# Altium PCB DClassAmp.PcbDoc (part 2 of 3)
Units mm, origin at the board's own origin, x right, y up, seen from the top; angles counter-clockwise.
Board outline 100 x 100 mm, 4 copper layers (Top Layer, Layer 1, Layer 2, Bottom Layer), stack 1.57 mm thick; 192 components, 70 nets, 450 pads, 316 vias.
Unrouted connection lines stored in the file: 103.
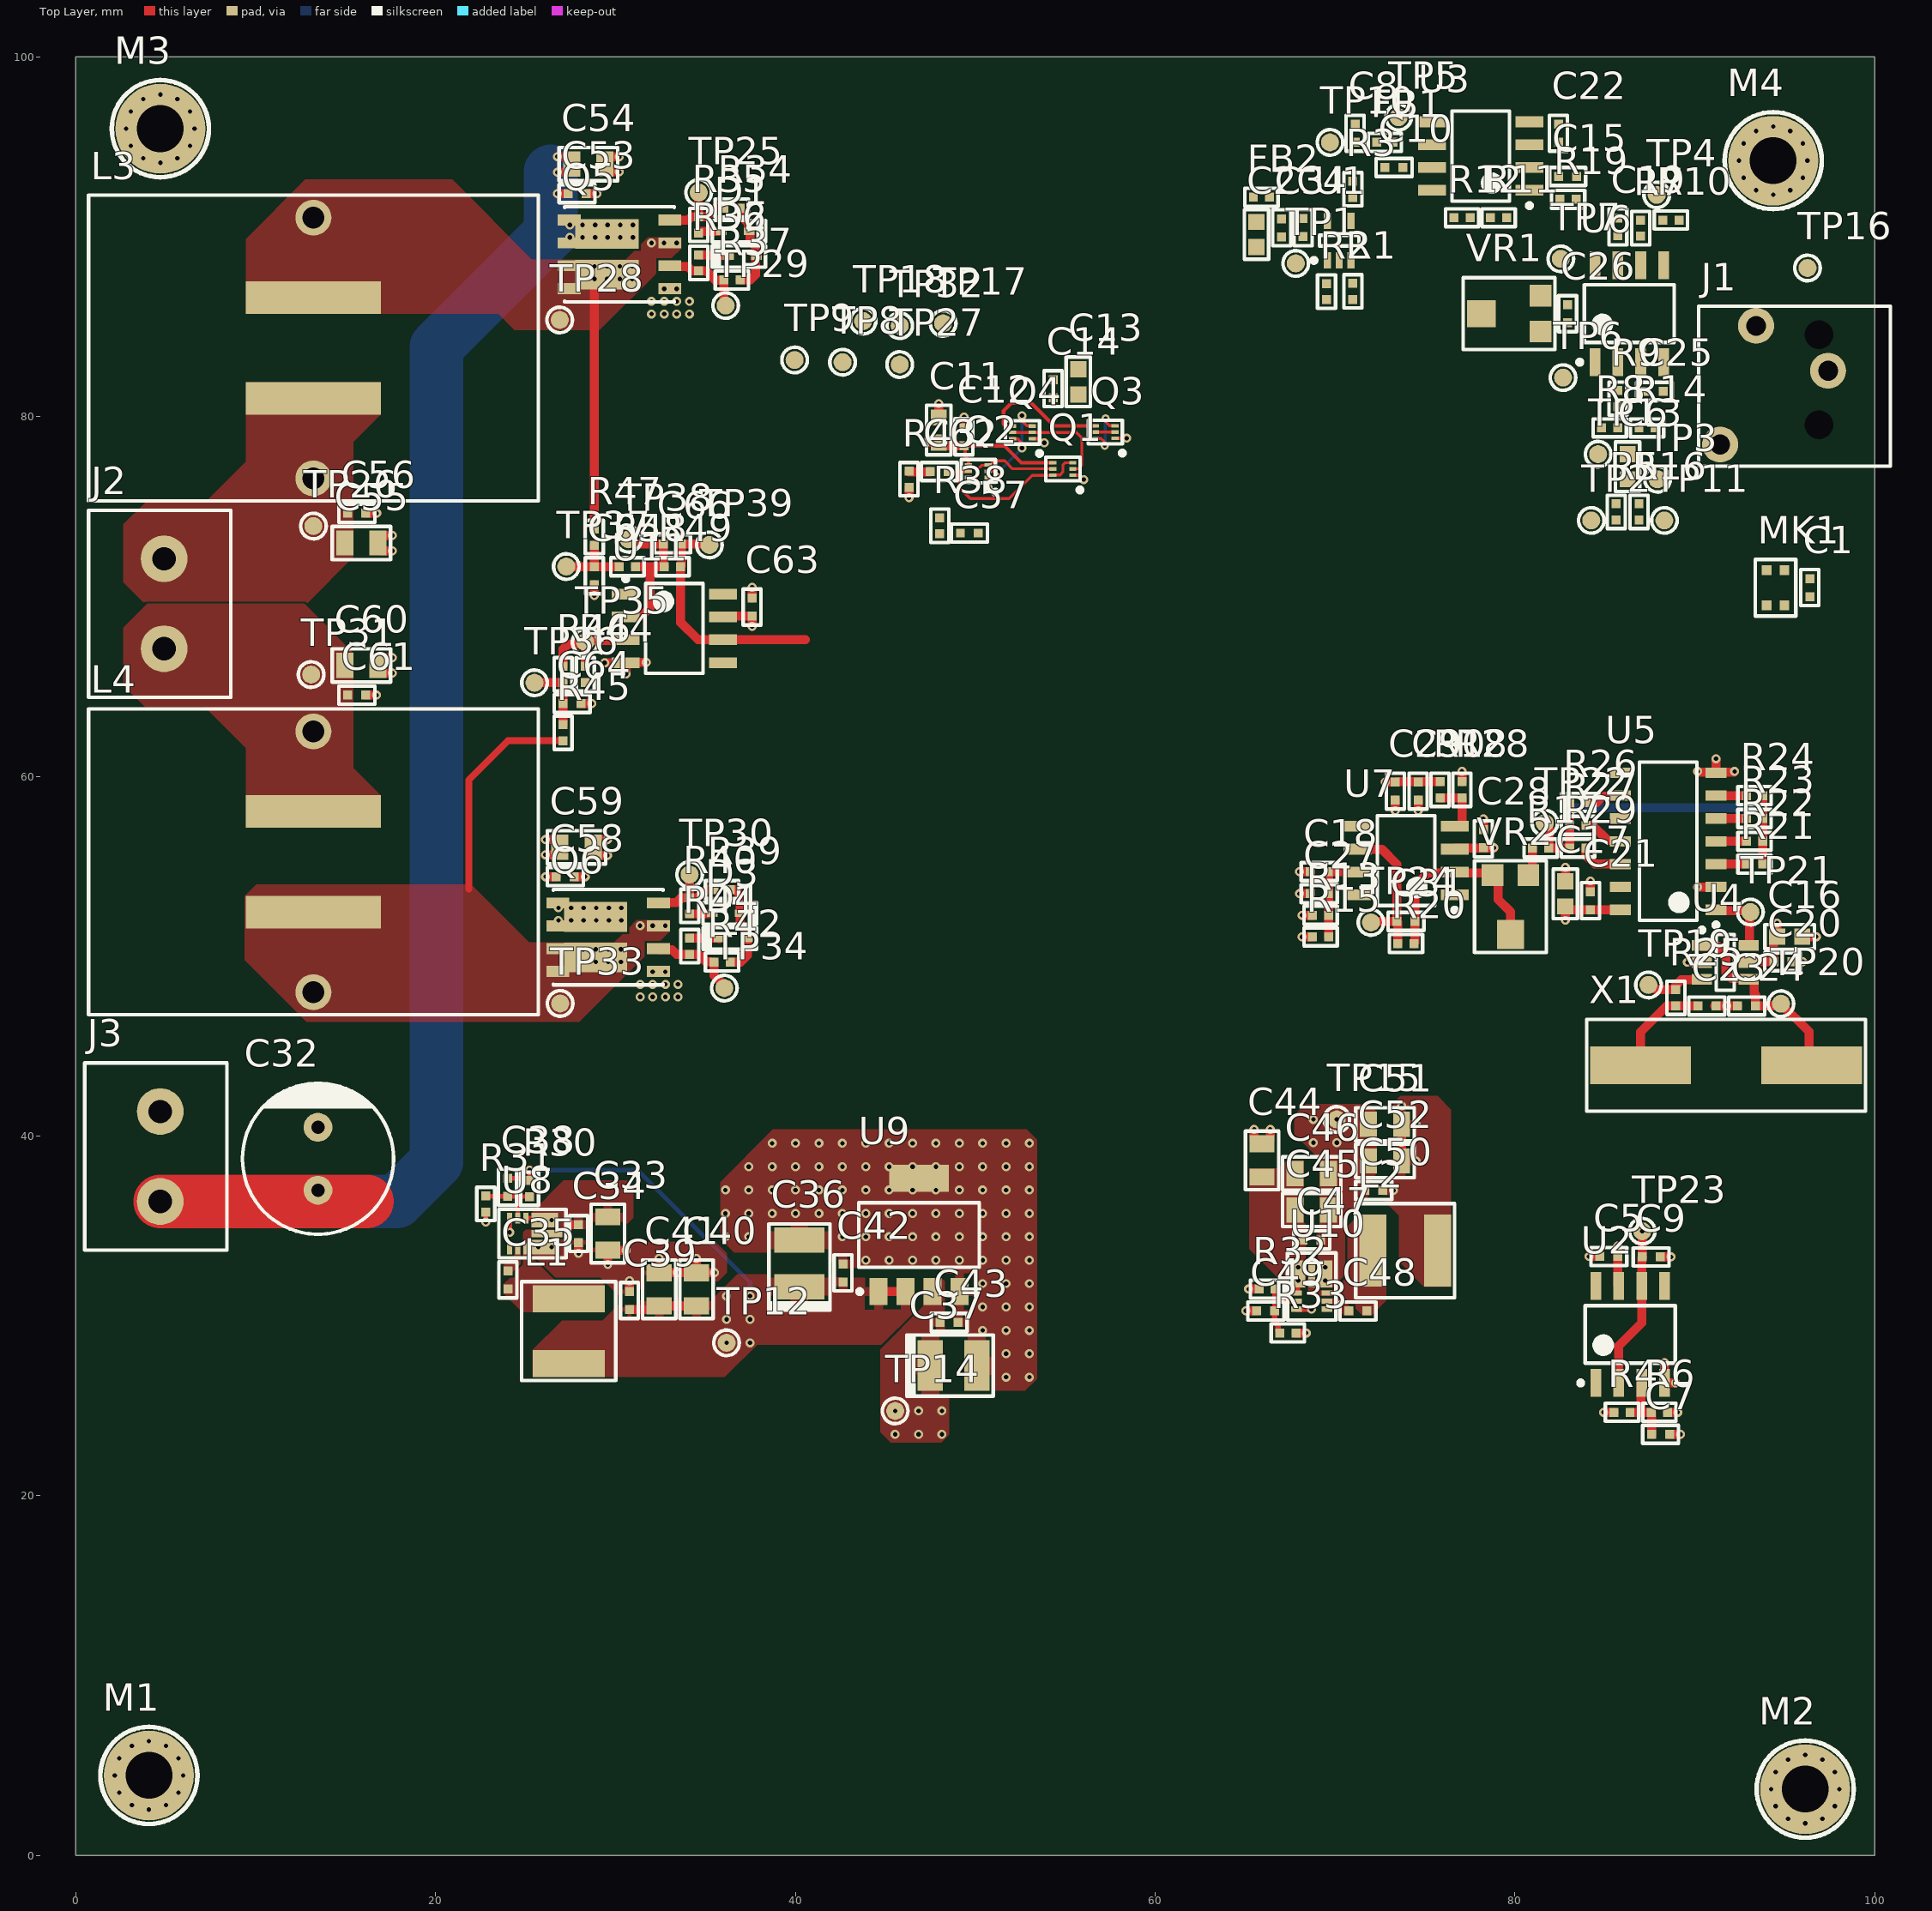
[diagram p0: Top Layer view]

## Part data (continued)
R1 R2 R3 R5 R12 R13 R15 R16 R18 R21 R22 R23 R24 R25 R26 R27 R28 R29: library part "RES 0R 63mW 0402", "GLOVE, POLYAMIDE, L/FREE, PU, SIZE 6 - More Details", Case Code (Imperial)=0402, Case Code (Metric)=1005, Current Rating=1A, Manufacturer="Stackpole Electronics", Manufacturer Part Number=RMCF0402ZT0R00, Max Operating Temperature=155°C, Max Power Dissipation=63mW, Min Operating Temperature=-55°C, Resistor Type="Thick Film", Supplier Part Number 1=RMCF0402ZT0R00CT-ND, Working Voltage=50V, Case/Package=0402, Category="Chip SMD Resistors", ComponentLink1Description=https://datasheet.ciiva.com/26835/getdatasheetpartid-409751-26835612.pdf?src-supplier=Verical, ComponentLink1URL=https://datasheet.ciiva.com/26835/getdatasheetpartid-409751-26835612.pdf?src-supplier=Verical, Construction=Rectangular, Contact Plating=Tin,Matte, Depth=0.5mm, Features="Automotive AEC-Q200", Height=0.016inch, Lead Free="Lead Free", Length=0.039inch, Military Standard=Not, Mount="Surface Mount", Number of Terminations=2, Packaging="Tape and Reel", Power Rating=63mW, Pricing 1="1=0.10000, 10=0.01000, 25=0.00720, 50=0.00560, 100=0.00410, 250=0.00316, 500=0.00252, 1000=0.00186, 5000=0.00133 (USD)", Radiation Hardening=No, Resistance=0R, RoHS=Yes, RoHS Compliant=Yes, Series=RMCF, Stock 1=5203223, Supplier 1=Digi-Key, Technology="THICK FILM", Width=0.02inch
R4 R6: library part "RES 10k00 0.1% 63mW 0402", "Res Thin Film 0402 10K Ohm 0.1% 0.063W ±25ppm/°C Molded SMD Punched Carrier T/R", Case Code (Imperial)=0402, Case Code (Metric)=1005, Manufacturer=Panasonic, Manufacturer Part Number=ERA-2AEB103X, Max Operating Temperature=155°C, Max Power Dissipation=63mW, Min Operating Temperature=-55°C, Package Quantity=1, Resistance=10kR, Resistance Tolerance=0.1%, Resistor Type="Thin Film", Supplier Part Number 1=P10KDCCT-ND, Temperature Coefficient=25ppm/°C, Voltage Rating=25V, Case/Package=0402, Category="Chip SMD Resistors", ComponentLink1Description=https://datasheet.ciiva.com/11812/0900766b80beefcc-11812131.pdf?src-supplier=RSComponents, ComponentLink1URL=https://datasheet.ciiva.com/11812/0900766b80beefcc-11812131.pdf?src-supplier=RSComponents, ComponentLink2Description=https://datasheet.ciiva.com/7001/39845-7001394.pdf?src-supplier=Newark, ComponentLink2URL=https://datasheet.ciiva.com/7001/39845-7001394.pdf?src-supplier=Newark, ComponentLink3Description=https://datasheet.ciiva.com/5838/328837-5838011.pdf?src-supplier=Farnell, ComponentLink3URL=https://datasheet.ciiva.com/5838/328837-5838011.pdf?src-supplier=Farnell, ComponentLink4Description=https://datasheet.ciiva.com/9116/aoa0000ce26-9116649.pdf?src-supplier=Avnet, ComponentLink4URL=https://datasheet.ciiva.com/9116/aoa0000ce26-9116649.pdf?src-supplier=Avnet, ComponentLink5Description=https://datasheet.ciiva.com/9117/aoa0000ce26-9117366.pdf?src-supplier=Avnet, ComponentLink5URL=https://datasheet.ciiva.com/9117/aoa0000ce26-9117366.pdf?src-supplier=Avnet, ComponentLink6Description=https://datasheet.ciiva.com/30213/54aoa0000ce26-30213096.pdf?src-supplier=Onlinecomponents.com, ComponentLink6URL=https://datasheet.ciiva.com/30213/54aoa0000ce26-30213096.pdf?src-supplier=Onlinecomponents.com, ComponentLink7Description=https://datasheet.ciiva.com/16426/aoa0000ce26-16426203.pdf?src-supplier=Future+Electronics, ComponentLink7URL=https://datasheet.ciiva.com/16426/aoa0000ce26-16426203.pdf?src-supplier=Future+Electronics, ComponentLink8Description=https://datasheet.ciiva.com/46398/328837-46398998.pdf?src-supplier=Element14, ComponentLink8URL=https://datasheet.ciiva.com/46398/328837-46398998.pdf?src-supplier=Element14, ComponentLink9Description=https://datasheet.ciiva.com/46398/328837-46398999.pdf?src-supplier=Element14, ComponentLink9URL=https://datasheet.ciiva.com/46398/328837-46398999.pdf?src-supplier=Element14, ComponentLink10Description=https://datasheet.ciiva.com/16768/70068849-16768699.pdf?src-supplier=Allied+Electronics, ComponentLink10URL=https://datasheet.ciiva.com/16768/70068849-16768699.pdf?src-supplier=Allied+Electronics, Construction=Rectangular, Contact Plating=Tin, Depth=0.5mm, Features="Automotive AEC-Q200", Height=0.35mm, Lead Free="Lead Free", Length=1mm, Military Standard=Not, Mount="Surface Mount", Number of Pins=2, Number of Terminations=2, Packaging="Tape and Reel", Power Rating=63mW, Pricing 1="1=0.44000, 10=0.31900, 100=0.12780, 1000=0.06295, 2500=0.05832, 5000=0.05277 (USD)", Radiation Hardening=No, REACH SVHC=Unknown, RoHS=Yes, RoHS Compliant=Yes, Series=ERA-2A, Size Code=0402, Stock 1=522097, Supplier 1=Digi-Key, Technology="METAL FILM", Termination=SMD/SMT, Tolerance=0.1%, Voltage Rating (DC)=25V, Width=0.5mm
R7 R10: library part "RES 15k0 1% 63mW 0402", "Res Thick Film 0402 15K Ohm 1% 0.063W(1/16W) ±100ppm/C Pad SMD Automotive T/R", Case Code (Imperial)=0402, Case Code (Metric)=1005, Manufacturer="Stackpole Electronics", Manufacturer Part Number=RMCF0402FT15K0, Max Operating Temperature=155°C, Max Power Dissipation=63mW, Min Operating Temperature=-55°C, Resistance=15kR, Resistor Type="Thick Film", Supplier Part Number 1=RMCF0402FT15K0CT-ND, Temperature Coefficient=100ppm/°C, Tolerance=1%, Case/Package=0402, Category="Chip SMD Resistors", ComponentLink1Description=http://components.arrow.com/part/dataview/50576585S147344N1174?src-supplier=Arrow+Electronics, ComponentLink1URL=http://components.arrow.com/part/dataview/50576585S147344N1174?src-supplier=Arrow+Electronics, ComponentLink2Description=http://www1.futureelectronics.com/doc/STACKPOLE%20ELECTRONICS/RMCF-1__16S-15K-1%25-R.pdf?src-supplier=Future+Electronics, ComponentLink2URL=http://www1.futureelectronics.com/doc/STACKPOLE%20ELECTRONICS/RMCF-1__16S-15K-1%25-R.pdf?src-supplier=Future+Electronics, ComponentLink3Description=https://www.seielect.com/catalog/SEI-RMCF_RMCP.pdf?src-supplier=Avnet, ComponentLink3URL=https://www.seielect.com/catalog/SEI-RMCF_RMCP.pdf?src-supplier=Avnet, ComponentLink4Description=https://www.seielect.com/catalog/sei-rmcf_rmcp.pdf?src-supplier=Digi-Key, ComponentLink4URL=https://www.seielect.com/catalog/sei-rmcf_rmcp.pdf?src-supplier=Digi-Key, Contact Plating=Tin,Matte, Features="Automotive AEC-Q200", Height=0.016inch, Lead Free="Lead Free", Length=0.039inch, Mount="Surface Mount", Number of Terminations=2, Packaging="Tape and Reel", Power Rating=63mW, Pricing 1="1=0.10000, 10=0.01500, 100=0.00610, 1000=0.00274, 2500=0.00238, 5000=0.00197 (USD)", Radiation Hardening=No, RoHS=Yes, RoHS Compliant=Yes, Series=RMCF, Size Code=0402, Stock 1=18382, Supplier 1=Digi-Key, Width=0.02inch
R8 R9 R11 R14 R38 R43 R44 R45 R47 R49: library part "RES 10k0 1% 63mW 0402", "Res General Purpose Thick Film 0402 10K Ohm 1% 1/16W ±100ppm/°C Molded SMD Paper T/R", Case Code (Imperial)=0402, Case Code (Metric)=1005, Manufacturer=Yageo, Manufacturer Part Number=RC0402FR-0710KL, Max Operating Temperature=155°C, Max Power Dissipation=63mW, Min Operating Temperature=-55°C, Power Rating=62.5mW, Resistance=10kR, Resistance Tolerance=1%, Resistor Type="Thick Film", Supplier Part Number 1=1987643, Temperature Coefficient=100ppm/°C, Voltage Rating=50V, Case/Package=0402, Category="Chip SMD Resistors", ComponentLink1Description=https://datasheet.ciiva.com/7660/38568-7660787.pdf?src-supplier=Element14, ComponentLink1URL=https://datasheet.ciiva.com/7660/38568-7660787.pdf?src-supplier=Element14, ComponentLink2Description=https://datasheet.ciiva.com/12667/pyu-rc0402-51-rohs-l-6-r-12667067.pdf?src-supplier=Mouser, ComponentLink2URL=https://datasheet.ciiva.com/12667/pyu-rc0402-51-rohs-l-6-r-12667067.pdf?src-supplier=Mouser, ComponentLink3Description=https://datasheet.ciiva.com/7849/1784430-7849813.pdf?src-supplier=Element14, ComponentLink3URL=https://datasheet.ciiva.com/7849/1784430-7849813.pdf?src-supplier=Element14, ComponentLink4Description=https://datasheet.ciiva.com/7849/1686128-7849814.pdf?src-supplier=Element14, ComponentLink4URL=https://datasheet.ciiva.com/7849/1686128-7849814.pdf?src-supplier=Element14, ComponentLink5Description=https://datasheet.ciiva.com/7849/1784430-7849815.pdf?src-supplier=Element14, ComponentLink5URL=https://datasheet.ciiva.com/7849/1784430-7849815.pdf?src-supplier=Element14, ComponentLink6Description=https://datasheet.ciiva.com/7983/1018594-7983486.pdf?src-supplier=Element14, ComponentLink6URL=https://datasheet.ciiva.com/7983/1018594-7983486.pdf?src-supplier=Element14, ComponentLink7Description=https://datasheet.ciiva.com/22747/1018594-22747512.pdf?src-supplier=Element14, ComponentLink7URL=https://datasheet.ciiva.com/22747/1018594-22747512.pdf?src-supplier=Element14, Construction=Rectangular, Depth=0.5mm, Features="Moisture Resistant", Height=0.32mm, Lead Free="Lead Free", Lead Pitch=0.2mm, Length=1mm, Military Standard=Not, Number of Pins=2, Number of Terminations=2, Packaging="Tape and Reel", Pricing 1="10000=0.00300 (GBP)", REACH SVHC="No SVHC", RoHS=Yes, RoHS Compliant=Yes, Series=RC, Stock 1=29900, Supplier 1=RSComponents, Termination=SMD/SMT, Tolerance=1%, Voltage Rating (DC)=50V, Width=0.5mm, Working Voltage=50V
R17: library part "RES 33k0 1% 63mW 0402", "Res Thick Film 0402 33K Ohm 1% 0.063W(1/16W) ±100ppm/C Pad SMD T/R", Case Code (Imperial)=0402, Case Code (Metric)=1005, Manufacturer=Samsung, Manufacturer Part Number=RC1005F333CS, Max Operating Temperature=155°C, Max Power Dissipation=63mW, Min Operating Temperature=-55°C, Package Quantity=1, Resistance=33kR, Resistor Type="Thick Film", Supplier Part Number 1=1276-3461-2-ND, Temperature Coefficient=100ppm/°C, Tolerance=1%, Voltage Rating (DC)=50V, Case/Package=0402, Category="Chip SMD Resistors", ComponentLink1Description=http://components.arrow.com/part/dataview/51978774S9968740N4139?src-supplier=Arrow+Electronics, ComponentLink1URL=http://components.arrow.com/part/dataview/51978774S9968740N4139?src-supplier=Arrow+Electronics, ComponentLink2Description=http://components.arrow.com/part/dataview/0323_06900084?src-supplier=Arrow+Europe, ComponentLink2URL=http://components.arrow.com/part/dataview/0323_06900084?src-supplier=Arrow+Europe, ComponentLink3Description=http://www.samsungsem.com/servlet/FileDownload?type=spec&file=RC1005F9090CS.pdf&src-supplier=Avnet, ComponentLink3URL=http://www.samsungsem.com/servlet/FileDownload?type=spec&file=RC1005F9090CS.pdf&src-supplier=Avnet, ComponentLink4Description=http://www.samsungsem.com/kr/support/product-search/chip-resistor/RC1005F333CS.jsp?src-supplier=Digi-Key, ComponentLink4URL=http://www.samsungsem.com/kr/support/product-search/chip-resistor/RC1005F333CS.jsp?src-supplier=Digi-Key, Construction=Rectangular, Contact Plating=Tin, Depth=0.5mm, Features="Moisture Resistant", Height=0.016inch, Lead Free="Lead Free", Length=0.039inch, Military Standard=Not, Number of Terminations=2, Packaging="Tape and Reel", Pricing 1="10000=0.00695 (USD)", Radiation Hardening=No, RoHS=Yes, RoHS Compliant=Yes, Series=RC, Stock 1=330000, Supplier 1=Digi-Key, Width=0.02inch
R19 R20 R46 R48: library part "RES 100k 1% 63mW 0402", "Res Thick Film 0402 100K Ohm 1% 0.063W ±100ppm/°C Molded SMD Paper T/R", Case Code (Imperial)=0402, Case Code (Metric)=1005, Manufacturer="Stackpole Electronics", Manufacturer Part Number=RMCF0402FT100K, Max Operating Temperature=155°C, Max Power Dissipation=63mW, Min Operating Temperature=-55°C, Power Rating=62.5mW, Resistance=100kR, Resistor Type="Thick Film", Temperature Coefficient=100ppm/°C, Tolerance=1%, Case/Package=0402, Category="Chip SMD Resistors", ComponentLink1Description=https://datasheet.ciiva.com/15193/getdatasheetpartid-482656-15193415.pdf?src-supplier=Verical, ComponentLink1URL=https://datasheet.ciiva.com/15193/getdatasheetpartid-482656-15193415.pdf?src-supplier=Verical, Construction=Rectangular, Contact Plating=Tin,Matte, Depth=0.5mm, Features="Automotive AEC-Q200", Height=0.016inch, Lead Free="Lead Free", Length=1mm, Military Standard=Not, Mount="Surface Mount", Number of Terminations=2, Packaging="Tape and Reel", Pricing 1="10000=0.00170, 20000=0.00168, 40000=0.00163, 60000=0.00160, 80000=0.00154, 100000=0.00150, 1000000=0.00146 (USD)", Radiation Hardening=No, RoHS=Yes, RoHS Compliant=Yes, Series=RMCF, Size Code=0402, Stock 1=3260000, Supplier 1=Avnet, Supplier Part Number 1=RMCF0402FT100K, Width=0.02inch
R30 R32: library part "RES 120k 1% 63mW 0402", "Res General Purpose Thick Film 0402 120K Ohm 1% 1/16W ±100ppm/°C Molded SMD Paper T/R", Case Code (Imperial)=0402, Case Code (Metric)=1005, Manufacturer=Yageo, Manufacturer Part Number=RC0402FR-07120KL, Max Operating Temperature=155°C, Max Power Dissipation=63mW, Min Operating Temperature=-55°C, Package Quantity=1, Resistance=120kR, Resistance Tolerance=1%, Resistor Type="Thick Film", Supplier Part Number 1=1987650, Temperature Coefficient=100ppm/°C, Voltage Rating=50V, Case/Package=0402, Category="Chip SMD Resistors", ComponentLink1Description=https://datasheet.ciiva.com/11808/0900766b80c66297-11808308.pdf?src-supplier=RSComponents, ComponentLink1URL=https://datasheet.ciiva.com/11808/0900766b80c66297-11808308.pdf?src-supplier=RSComponents, ComponentLink2Description=https://datasheet.ciiva.com/2453/pyu-r-int-thick-7-2453517.pdf?src-supplier=Digi-Key, ComponentLink2URL=https://datasheet.ciiva.com/2453/pyu-r-int-thick-7-2453517.pdf?src-supplier=Digi-Key, ComponentLink3Description=https://datasheet.ciiva.com/2453/pyu-r-int-thick-7-2453518.pdf?src-supplier=Digi-Key, ComponentLink3URL=https://datasheet.ciiva.com/2453/pyu-r-int-thick-7-2453518.pdf?src-supplier=Digi-Key, ComponentLink4Description=https://datasheet.ciiva.com/2453/pyu-r-int-thick-7-2453519.pdf?src-supplier=Digi-Key, ComponentLink4URL=https://datasheet.ciiva.com/2453/pyu-r-int-thick-7-2453519.pdf?src-supplier=Digi-Key, ComponentLink5Description=https://datasheet.ciiva.com/12577/pyu-rc0402-51-rohs-l-6-r-12577334.pdf?src-supplier=Mouser, ComponentLink5URL=https://datasheet.ciiva.com/12577/pyu-rc0402-51-rohs-l-6-r-12577334.pdf?src-supplier=Mouser, ComponentLink6Description=https://datasheet.ciiva.com/16741/pyu-rc0402-51-rohs-l-6-r-16741433.pdf?src-supplier=Future+Electronics, ComponentLink6URL=https://datasheet.ciiva.com/16741/pyu-rc0402-51-rohs-l-6-r-16741433.pdf?src-supplier=Future+Electronics, ComponentLink7Description=https://datasheet.ciiva.com/7849/1018594-7849829.pdf?src-supplier=Element14, ComponentLink7URL=https://datasheet.ciiva.com/7849/1018594-7849829.pdf?src-supplier=Element14, Construction=Rectangular, Depth=0.5mm, Features="Moisture Resistant", Height=0.016inch, Lead Free="Lead Free", Length=1mm, Military Standard=Not, Number of Terminations=2, Packaging="Tape and Reel", Power Rating=63mW, Pricing 1="10000=0.00100 (GBP)", REACH SVHC=Unknown, RoHS=Yes, RoHS Compliant=Yes, Series=RC, Stock 1=18500, Supplier 1=RSComponents, Technology="THICK FILM", Termination=SMD/SMT, Tolerance=1%, Weight=2.3E-05oz, Width=0.5mm, Working Voltage=50V
R31 R33: library part "RES 30k0 1% 63mW 0402", "Res General Purpose Thick Film 0402 30k Ohm 1% 1/16W ±100ppm/°C Molded Paper T/R", Case Code (Imperial)=0402, Case Code (Metric)=1005, Manufacturer=Yageo, Manufacturer Part Number=RC0402FR-0730KL, Max Operating Temperature=155°C, Max Power Dissipation=63mW, Min Operating Temperature=-55°C, Power Rating=62.5mW, Resistance=30kR, Resistance Tolerance=1%, Resistor Type="Thick Film", Supplier Part Number 1=311-30.0KLRTR-ND, Temperature Coefficient=100ppm/°C, Voltage Rating=50V, Case/Package=0402, Category="Chip SMD Resistors", ComponentLink1Description=https://datasheet.ciiva.com/12577/pyu-rc0402-51-rohs-l-6-r-12577743.pdf?src-supplier=Mouser, ComponentLink1URL=https://datasheet.ciiva.com/12577/pyu-rc0402-51-rohs-l-6-r-12577743.pdf?src-supplier=Mouser, ComponentLink2Description=https://datasheet.ciiva.com/7849/1018594-7849957.pdf?src-supplier=Element14, ComponentLink2URL=https://datasheet.ciiva.com/7849/1018594-7849957.pdf?src-supplier=Element14, ComponentLink3Description=https://datasheet.ciiva.com/46394/1018594-46394938.pdf?src-supplier=Element14, ComponentLink3URL=https://datasheet.ciiva.com/46394/1018594-46394938.pdf?src-supplier=Element14, Construction=Rectangular, Depth=0.5mm, Features="Moisture Resistant", Height=0.35mm, Lead Free="Lead Free", Length=1mm, Military Standard=Not, Number of Terminations=2, Packaging="Tape and Reel", Pricing 1="10000=0.00186 (USD)", REACH SVHC=Unknown, RoHS=Yes, RoHS Compliant=Yes, Series=RC, Size Code=0402, Stock 1=1354843, Supplier 1=Digi-Key, Termination=SMD/SMT, Tolerance=1%, Voltage Rating (DC)=50V, Weight=2.3E-05oz, Width=0.5mm